# Altium PCB PCB.PcbDoc (part 2 of 2)
Units mm, origin at the board's own origin, x right, y up, seen from the top; angles counter-clockwise.
Board outline 200.03 x 130.81 mm, 2 copper layers (Top Layer, Bottom Layer); 172 components, 135 nets, 513 pads, 0 vias.
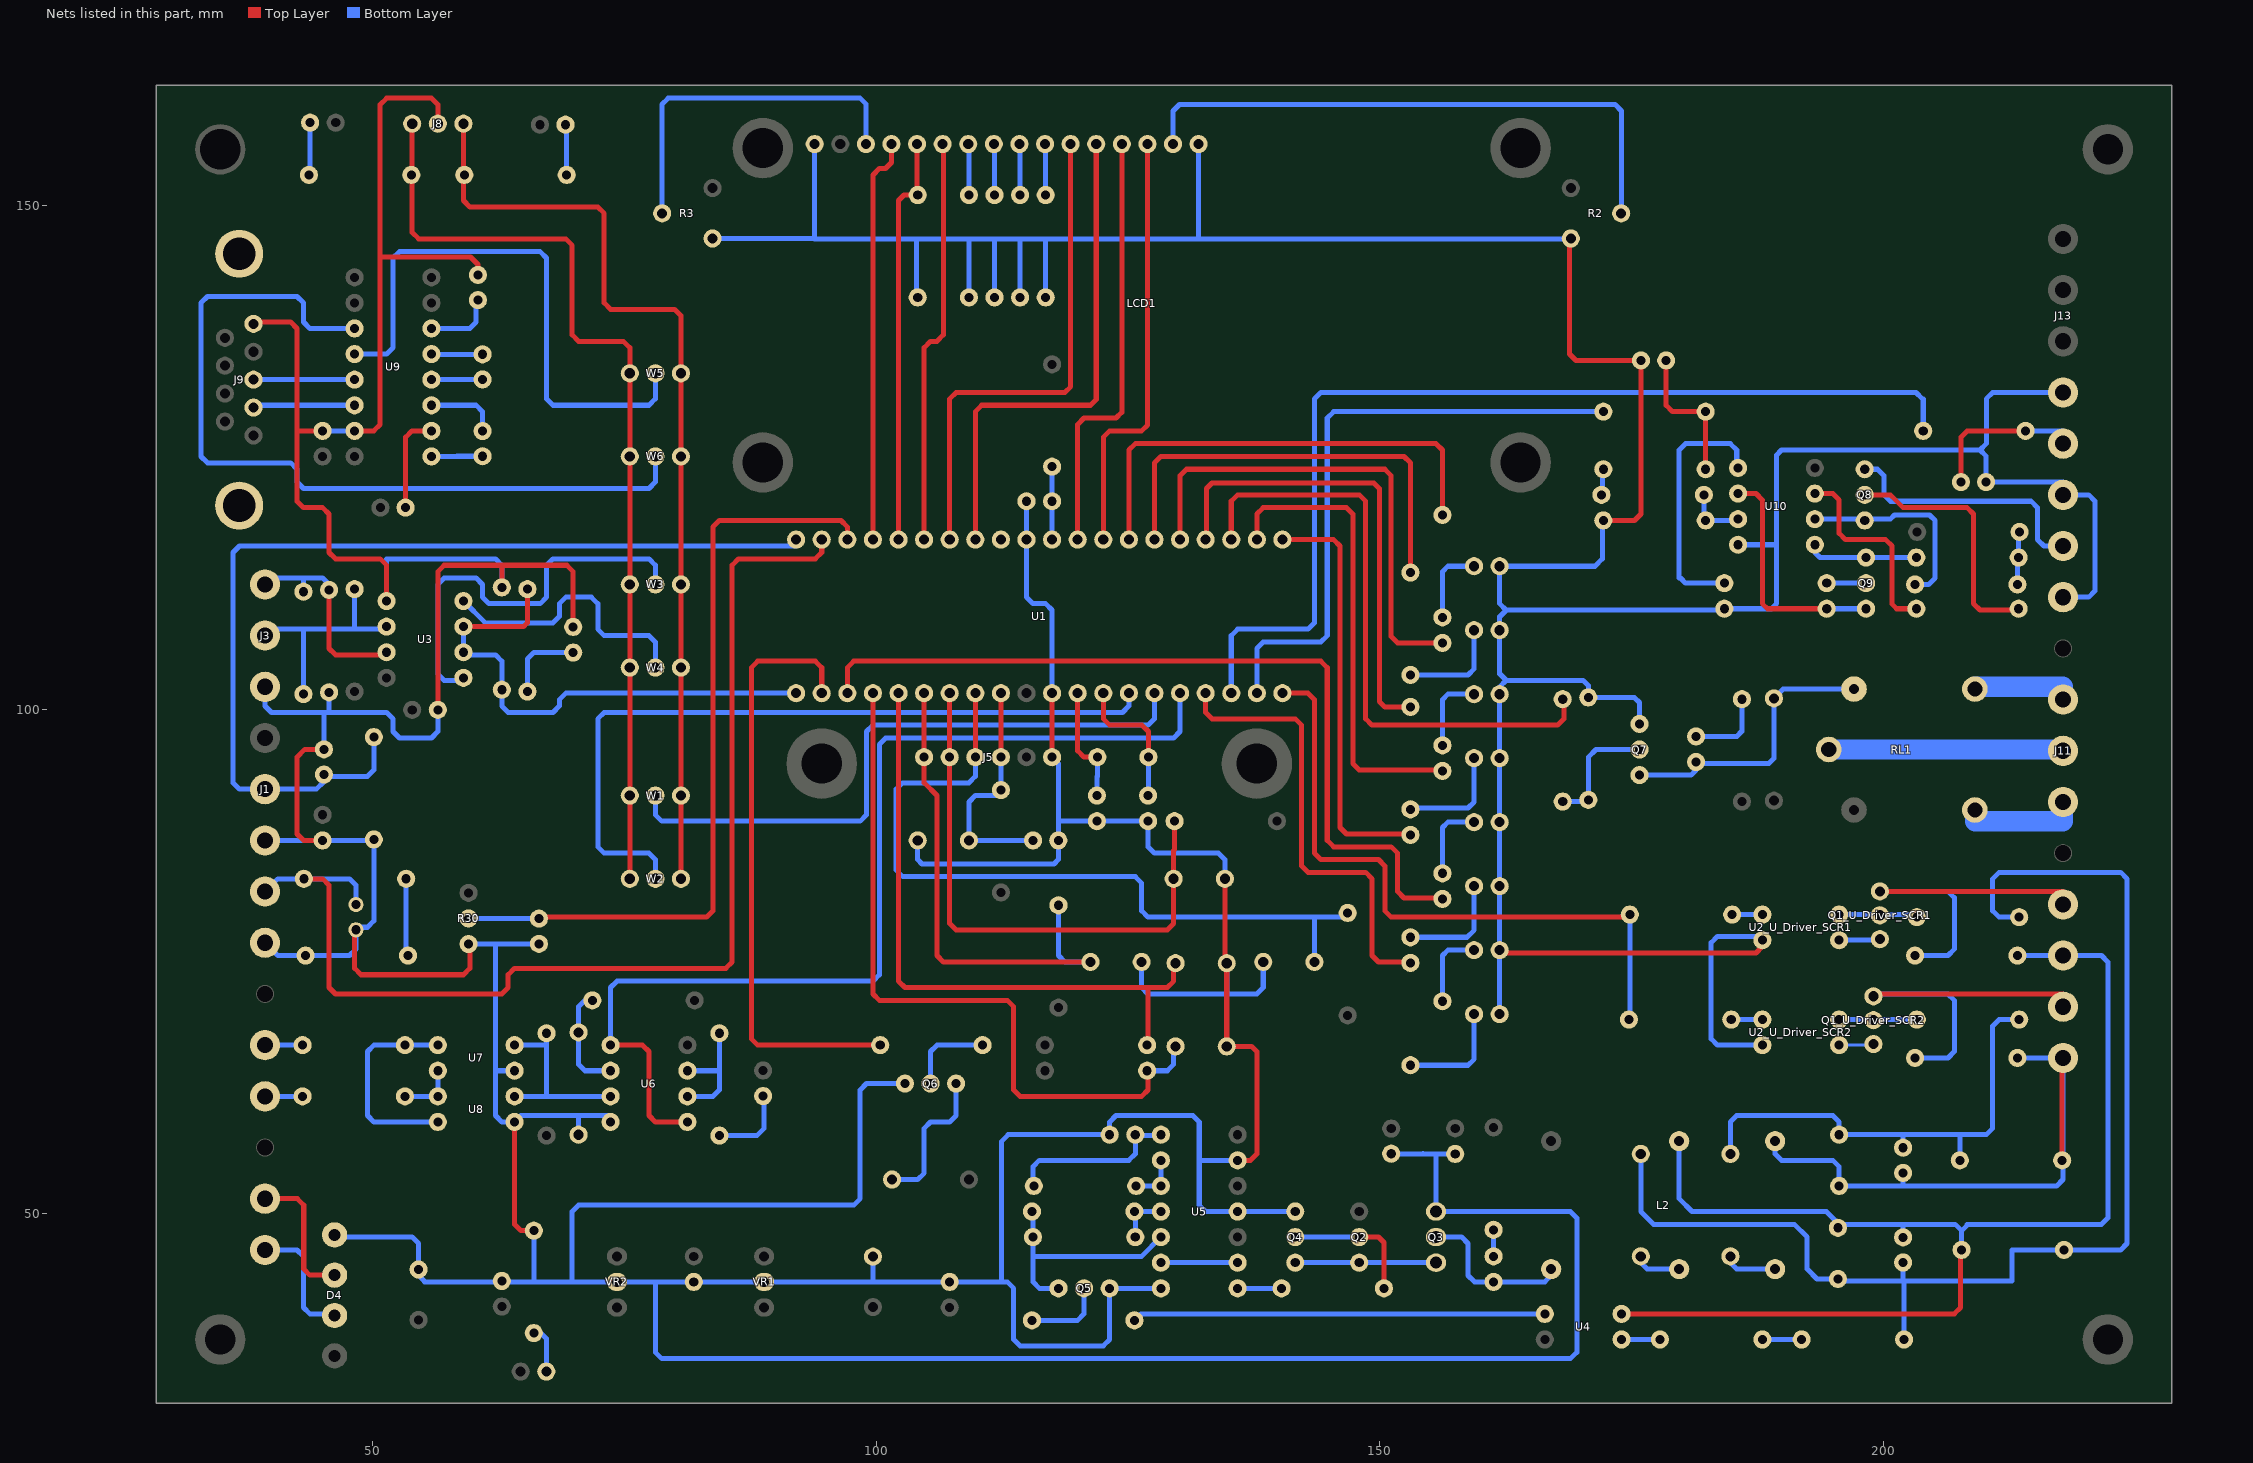
[diagram p2: the nets of this part, all layers, seen from the top]

## Nets (pads, with @x,y where several pads share a name; then routed paths per layer and width w, separated by ;. In a path a pad name is that pad's centre, name@x,y a point inside that pad or via, vN(x,y) a via of type N, cw(c..) or ccw(c..) an arc to the next point about the centre after c; other vN are vias at no path point) (continued)
GND: "C17_U_PWM to DC1.2" "C17_U_PWM to DC2.2" "J6_U_PWM to DC2.1" C1.2 C2.2 C3.2 C4.2 C5.2 C6.2 C7.1 C8.1 C9.2 C10.2 C12.1 C14.2 C18.1 C20.2 C24.1 C25.2 C26.2 C27.2 C28.1 D1_U_Display_LED1.2 D1_U_Display_LED2.2 D1_U_Display_LED3.2 D1_U_Display_LED4.2 D1_U_Display_LED5.2 D1_U_Display_LED6.2 D1_U_Display_LED7.2 D1_U_Display_LED8.2 D3.2 D4.1 D10.2 J1.3 J3.3 J5.6 J8.2 J9.5 J9.10 J9.11 J10.2 J12.1 J13.1 K1.1 K2_U_Key_Pull-up1.1 K2_U_Key_Pull-up2.1 K2_U_Key_Pull-up3.1 K2_U_Key_Pull-up4.1 K2_U_Key_Pull-up5.1 LCD1.1 LCD1.16 Q3.3 Q4.1 Q5.3 Q6.3 Q7.3 R1.2 R2.2 R3.1 R4.1 R9.1 R13.2 R14.1 R15.2 R30.1 R35.2 R38.1 R48.2 R49.1 R50.1 R51.1 R52.1 U1.11 U1.31 U2_U_Driver_SCR1.2 U2_U_Driver_SCR2.2 U3.5 U5.7 U5.11 U5.13 U6.4 U7.3 U8.3 U9.15 U10.4 VR1.2 VR2.2 | length 1187.1
  Top Layer w0.5: J9.5@38.225,138.255 38.4,138.43 41.91,138.43 42.545,137.795 42.545,127.635 ; C2.2@45.085,86.995 43.18,86.995 42.545,87.63 42.545,95.25 43.324,96.029 C1.2@45.212,96.029 ; C25.2@45.085,127.635 42.545,127.635 ; C27.2@48.26,78.248 48.26,74.295 48.895,73.66 59.055,73.66 59.69,74.295 59.69,76.2 59.563,76.327 R30.1@59.563,76.708 ; U9.15@48.26,127.635 50.165,127.635 50.8,128.27 50.8,144.882 ; U3.5@51.435,110.744 51.435,114.3 50.8,114.935 46.355,114.935 45.72,115.57 45.72,119.38 45.085,120.015 43.18,120.015 42.545,120.65 42.545,127.635 ; C6.2@56.515,99.949 56.515,113.665 57.15,114.3 62.865,114.3 ; J8.2@56.515,158.115 56.515,160.02 55.88,160.655 51.435,160.655 50.8,160.02 50.8,144.882 ; C24.1@60.5,143.109 60.5,144.145 59.763,144.882 50.8,144.882 ; R14.1@62.865,112.104 62.865,114.3 ; U8.3@64.135,59.055 64.135,48.895 64.77,48.26 R15.2@66.04,48.26 ; D3.2@69.95,108.174 69.95,113.665 69.315,114.3 62.865,114.3 ; J5.6@117.475,95.25 U1.11@117.475,101.6 ; K2_U_Key_Pull-up2.1@134.62,74.93 K2_U_Key_Pull-up1.1@134.62,83.185 ; K2_U_Key_Pull-up2.1@134.808,74.805 K2_U_Key_Pull-up3.1@134.808,66.55 137.285,66.55 137.795,66.04 137.795,55.88 137.16,55.245 U5.13@135.89,55.245 ; D1_U_Display_LED7.2@161.925,75.819 187.325,75.819 187.96,76.454 U2_U_Driver_SCR1.2@187.96,77.089 ; R2.2@168.823,147.196 168.823,135.255 169.458,134.62 175.915,134.62 175.915,119.38 175.28,118.745 172.81,118.745 R48.2@172.302,118.237
  Bottom Layer w0.5: J10.2@39.37,76.835 40.64,75.565 R35.2@43.397,75.565 47.752,75.565 48.387,76.2 48.387,78.375 49.53,78.375 50.165,79.01 R1.2@50.165,86.995 ; J1.3@39.37,86.995 C2.2@45.085,86.995 R1.2@50.165,86.995 ; J3.3@39.37,102.235 39.37,100.33 40.005,99.695 45.72,99.695 ; C25.2@45.085,127.635 U9.15@48.26,127.635 ; C1.2@45.212,96.029 45.212,99.568 ; R13.2@45.72,101.69 45.72,99.695 ; D4.1@46.275,47.846 46.496,47.625 53.975,47.625 54.61,46.99 C9.2@54.61,44.41 54.61,43.815 55.205,43.22 ; R1.2@50.165,87.085 R1.2@50.165,86.995 ; U3.5@51.435,110.744 51.435,114.935 62.23,114.935 62.865,114.3 R14.1@62.865,112.104 ; 55.205,43.18 69.85,43.18 ; C6.2@56.515,99.949 56.515,97.79 55.88,97.155 52.705,97.155 52.07,97.79 52.07,99.06 51.435,99.695 45.72,99.695 ; R30.1@59.563,76.708 63.043,76.708 63.063,76.728 C20.2@66.548,76.728 62.23,76.728 62.23,64.135 ; U7.3@64.135,64.135 62.23,64.135 ; 66.04,43.27 R15.2@66.04,48.26 ; D10.2@70.485,57.785 70.485,59.69 ; U6.4@73.66,59.055 73.66,59.69 70.485,59.69 ; R3.1@83.78,146.725 93.825,146.725 ; 93.915,146.685 104.01,146.685 ; 93.915,146.815 LCD1.1@93.915,156.098 ; C10.2@99.695,45.68 99.695,43.18 ; Q6.3@102.87,62.865 99.06,62.865 98.425,62.23 98.425,51.435 97.79,50.8 70.485,50.8 69.85,50.165 69.85,43.18 ; R4.1@104.01,141.01 104.01,146.685 ; K1.1@104.14,86.995 104.14,85.09 104.572,84.658 117.658,84.658 118.09,85.09 C26.2@118.09,86.995 ; R52.1@109.22,140.88 109.22,146.685 ; R51.1@111.76,140.88 111.76,146.685 ; R50.1@114.3,140.88 114.3,146.685 ; C3.2@114.935,120.65 U1.31@114.935,116.84 114.935,111.125 115.57,110.49 116.84,110.49 117.475,109.855 U1.11@117.475,101.6 ; R9.1@116.84,140.88 116.84,146.685 ; J5.6@117.475,95.25 118.09,94.635 C26.2@118.09,86.995 ; K2_U_Key_Pull-up4.1@126.365,74.93 126.365,72.39 127,71.755 134.62,71.755 ; U5.7@128.27,42.545 Q5.3@123.19,42.545 123.19,37.465 122.555,36.83 114.3,36.83 113.665,37.465 113.665,42.545 113.03,43.18 112.395,43.18 ; 132.015,146.75 LCD1.16@132.015,156.098 ; K2_U_Key_Pull-up1.1@134.62,83.185 134.62,85.09 133.985,85.725 127.635,85.725 127,86.36 C4.2@127,88.9 C5.2@121.92,88.9 118.09,88.9 C26.2@118.09,86.995 ; K2_U_Key_Pull-up2.1@134.808,74.805 134.808,71.943 134.62,71.755 ; U5.13@135.89,55.245 132.08,55.245 ; K2_U_Key_Pull-up5.1@138.43,74.93 138.43,72.39 137.795,71.755 134.62,71.755 ; Q4.1@141.605,50.165 U5.11@135.89,50.165 132.715,50.165 132.08,50.8 132.08,55.245 ; C14.2@151.13,55.88 154.3,55.88 ; 154.28,55.9 154.3,55.88 ; C12.1@157.48,55.88 155.575,55.88 ; D1_U_Display_LED8.2@161.895,69.75 D1_U_Display_LED7.2@161.895,76.1 D1_U_Display_LED6.2@161.895,82.45 D1_U_Display_LED5.2@161.895,88.8 D1_U_Display_LED4.2@161.895,95.15 D1_U_Display_LED3.2@161.895,101.5 161.895,102.235 162.53,102.87 162.56,102.87 ; R2.2@168.95,146.685 116.84,146.685 ; R48.2@172.302,118.237 172.085,118.02 172.085,114.935 171.35,114.2 D1_U_Display_LED1.2@161.895,114.2 161.895,110.49 162.53,109.855 162.56,109.855 ; Q7.3@175.768,98.552 175.768,100.674 175.26,101.182 R38.1@170.688,101.182 170.688,102.362 170.18,102.87 162.56,102.87 ; U10.4@185.547,116.332 189.357,116.332 ; U2_U_Driver_SCR2.2@187.96,66.675 183.515,66.675 182.88,67.31 182.88,76.835 183.515,77.47 187.579,77.47 U2_U_Driver_SCR1.2@187.96,77.089 ; J12.1@217.805,111.125 220.345,111.125 220.98,111.76 220.98,120.65 220.345,121.285 217.805,121.285 217.805,122.555 210.165,122.555 210.165,125.115 209.55,125.73 ; J13.1@217.805,131.445 210.82,131.445 210.185,130.81 210.185,126.365 209.55,125.73 ; 62.23,64.135 62.23,59.69 62.865,59.055 U8.3@64.135,59.055 64.77,59.69 70.485,59.69 ; 69.85,43.18 VR2.2@74.295,43.18 78.105,43.18 ; 78.105,43.18 78.105,36.195 78.74,35.56 168.91,35.56 169.545,36.195 169.545,49.53 168.91,50.165 Q3.3@155.575,50.165 155.575,55.88 ; 78.105,43.18 C28.1@81.915,43.18 VR1.2@88.9,43.18 99.695,43.18 ; 99.695,43.18 C8.1@107.315,43.18 112.395,43.18 ; 104.01,146.685 109.22,146.685 ; 109.22,146.685 111.76,146.685 ; 111.76,146.685 114.3,146.685 ; 112.395,43.18 112.47,43.255 112.47,57.135 113.12,57.785 C18.1@123.19,57.785 123.19,59.055 123.825,59.69 131.445,59.69 132.08,59.055 132.08,55.245 ; 114.3,146.685 116.84,146.685 ; 154.3,55.88 155.575,55.88 ; 162.56,102.87 161.925,103.505 161.895,103.505 D1_U_Display_LED2.2@161.895,107.85 161.895,109.22 161.925,109.22 162.56,109.855 ; 162.56,109.855 184.06,109.855 R49.1@184.187,109.982 188.849,109.982 189.357,110.49 189.357,116.332 ; 189.357,116.332 189.357,125.222 189.865,125.73 209.55,125.73
GND2_U_Driver_SCR1: C11.2 C13.1 J2_U_Driver_SCR1.1 L2.3 R8_U_Driver_SCR1.2 R17.2 U4.2 | length 128.6
  Top Layer w0.5: U4.2@173.99,40.005 207.01,40.005 207.645,40.64 R17.2@207.645,46.265 ; C13.1@195.11,48.895 C13.1@195.455,48.55
  Bottom Layer w0.5: L2.3@179.705,57.15 179.705,51.435 180.975,50.165 194.31,50.165 195.455,49.02 C13.1@195.455,48.55 195.8,48.895 201.93,48.895 ; C11.2@201.93,47.605 201.93,48.895 ; R17.2@207.735,46.355 207.735,48.26 ; R8_U_Driver_SCR1.2@213.27,75.565 J2_U_Driver_SCR1.1@217.805,75.565 221.615,75.565 222.25,74.93 222.25,49.53 221.615,48.895 208.28,48.895 208.28,48.805 207.735,48.26 ; 201.93,48.895 207.1,48.895 207.735,48.26
GND2_U_Driver_SCR2: C16.2 C17.1 J2_U_Driver_SCR2.1 L2.5 R8_U_Driver_SCR2.2 R21.2 | length 60.6
  Top Layer w0.5: R21.2@217.715,55.245 J2_U_Driver_SCR2.1@217.715,65.405
  Bottom Layer w0.5: L2.5@189.23,57.15 189.23,55.88 189.865,55.245 194.945,55.245 195.58,54.61 C17.1@195.58,52.705 201.93,52.705 ; C16.2@201.93,53.995 201.93,52.705 ; R8_U_Driver_SCR2.2@213.27,65.405 J2_U_Driver_SCR2.1@217.805,65.405 217.805,53.34 217.17,52.705 201.93,52.705
NetC1_1: C1.1 J1.2 R1.1 U1.40 | length 98.5
  Bottom Layer w0.5: R1.1@50.165,97.245 50.165,93.98 49.53,93.345 45.396,93.345 C1.1@45.212,93.529 45.212,92.837 44.45,92.075 J1.2@39.37,92.075 36.83,92.075 36.195,92.71 36.195,115.57 36.83,116.205 92.075,116.205 U1.40@92.075,116.84
NetC3_1: C3.1 L1.2 U1.30 | length 7.2
  Bottom Layer w0.5: U1.30@117.475,116.84 C3.1@117.475,120.65 L1.2@117.475,124.08
NetC4_1: C4.1 U1.13 X1.2 | length 13.9
  Top Layer w0.5: U1.13@122.555,101.6 122.555,99.06 123.19,98.425 126.405,98.425 127.04,97.79 X1.2@127.04,95.25
  Bottom Layer w0.5: C4.1@127.04,91.44 X1.2@127.04,95.25
NetC5_1: C5.1 U1.12 X1.1 | length 11.7
  Top Layer w0.5: U1.12@120.015,101.6 120.015,95.885 120.65,95.25 X1.1@121.96,95.25
  Bottom Layer w0.5: C5.1@121.92,91.44 121.92,93.32 121.96,93.36 X1.1@121.96,95.25
NetC15_1: C15.1 L2.2 Q3.2 | length 16
  Bottom Layer w0.5: Q3.2@155.575,47.625 158.115,47.625 158.75,46.99 158.75,43.815 159.385,43.18 C15.1@161.29,43.18 166.37,43.18 167.005,43.815 L2.2@167.005,44.45
NetC15_2: C15.2 R16.2 | length 2.6
  Bottom Layer w0.5: C15.2@161.29,45.72 R16.2@161.29,48.35
"NetC17_U_PWM to DC1_1": "C17_U_PWM to DC1.1" "R23_U_PWM to DC1.1" R45.1 | length 14.3
  Top Layer w0.5: 178.415,134.62 178.415,130.175 179.05,129.54 182.335,129.54 R45.1@182.335,123.825
"NetC17_U_PWM to DC2_1": "C17_U_PWM to DC2.1" "J6_U_PWM to DC2.2" "R23_U_PWM to DC2.1" | length 16.1
  Top Layer w0.5: 207.665,122.555 207.665,127 208.28,127.615 208.28,127.635 214.085,127.635
  Bottom Layer w0.5: 214.085,127.635 217.805,127.635 217.805,126.365
NetC18_2: C18.2 R18.2 U5.1 | length 17
  Bottom Layer w0.5: R18.2@115.57,52.795 115.57,54.61 116.205,55.245 125.095,55.245 125.73,55.88 C18.2@125.73,57.785 125.805,57.71 128.195,57.71 U5.1@128.27,57.785
NetC20_1: C20.1 R30.3 U1.38 | length 77.8
  Top Layer w0.5: C20.1@66.548,79.228 66.695,79.375 83.185,79.375 83.82,80.01 83.82,118.11 84.455,118.745 96.52,118.745 97.155,118.11 U1.38@97.155,116.84
  Bottom Layer w0.5: R30.3@59.563,79.248 63.043,79.248 63.063,79.228 C20.1@66.548,79.228
NetC21_1: C21.1 U9.2 | length 9.8
  Top Layer w0.5: C21.1@53.32,120.015 53.32,127 53.955,127.635 U9.2@55.88,127.635
NetC22_1: C22.1 U9.1 | length 5.1
  Bottom Layer w0.5: U9.1@55.88,125.095 58.395,125.095 58.415,125.115 C22.1@60.96,125.115
NetC22_2: C22.2 U9.3 | length 7.3
  Bottom Layer w0.5: U9.3@55.88,130.175 60.325,130.175 60.96,129.54 C22.2@60.96,127.615
NetC23_1: C23.1 U9.4 | length 5.1
  Bottom Layer w0.5: U9.4@55.88,132.715 58.395,132.715 58.415,132.735 C23.1@60.96,132.735
NetC23_2: C23.2 U9.5 | length 5.5
  Bottom Layer w0.5: U9.5@55.562,135.572 U9.5@55.88,135.255 ; U9.5@55.88,135.235 C23.2@60.96,135.235
NetC24_2: C24.2 U9.6 | length 7
  Bottom Layer w0.5: U9.6@55.88,137.795 59.69,137.795 60.325,138.43 60.325,140.434 C24.2@60.5,140.609
NetC26_1: C26.1 J5.4 K1.2 R33.2 U1.9 | length 23.8
  Top Layer w0.5: J5.4@112.395,95.25 U1.9@112.395,101.6
  Bottom Layer w0.5: J5.4@112.395,95.25 R33.2@112.395,91.985 112.395,91.44 109.855,91.44 109.22,90.805 K1.2@109.22,86.995 C26.1@115.59,86.995
NetC27_1: C27.1 J10.1 R34.1 U1.39 | length 117.3
  Top Layer w0.5: R34.1@43.217,83.185 45.085,83.185 45.72,82.55 45.72,72.39 46.355,71.755 62.865,71.755 63.5,72.39 63.5,73.66 64.135,74.295 85.09,74.295 85.725,74.93 85.725,114.3 86.36,114.935 93.98,114.935 94.615,115.57 U1.39@94.615,116.84
  Bottom Layer w0.5: J10.1@39.37,81.915 40.64,83.185 R34.1@43.217,83.185 47.752,83.185 48.387,82.55 C27.1@48.387,80.375
NetD1_U_Display_LED1_1: D1_U_Display_LED1.1 R5_U_Display_LED1.1 | length 7.9
  Bottom Layer w0.5: R5_U_Display_LED1.1@156.21,109.13 156.21,113.665 156.745,114.2 D1_U_Display_LED1.1@159.355,114.2
NetD1_U_Display_LED2_1: D1_U_Display_LED2.1 R5_U_Display_LED2.1 | length 10.4
  Bottom Layer w0.5: R5_U_Display_LED2.1@153.035,103.415 158.75,103.415 159.355,104.02 D1_U_Display_LED2.1@159.355,107.85
NetD1_U_Display_LED3_1: D1_U_Display_LED3.1 R5_U_Display_LED3.1 | length 7.9
  Bottom Layer w0.5: R5_U_Display_LED3.1@156.21,96.43 156.21,100.965 156.745,101.5 D1_U_Display_LED3.1@159.355,101.5
NetD1_U_Display_LED4_1: D1_U_Display_LED4.1 R5_U_Display_LED4.1 | length 11
  Bottom Layer w0.5: R5_U_Display_LED4.1@153.035,90.08 153.155,90.2 158.75,90.2 159.355,90.805 D1_U_Display_LED4.1@159.355,95.15
NetD1_U_Display_LED5_1: D1_U_Display_LED5.1 R5_U_Display_LED5.1 | length 7.9
  Bottom Layer w0.5: R5_U_Display_LED5.1@156.21,83.73 156.21,88.265 156.745,88.8 D1_U_Display_LED5.1@159.355,88.8
NetD1_U_Display_LED6_1: D1_U_Display_LED6.1 R5_U_Display_LED6.1 | length 11
  Bottom Layer w0.5: R5_U_Display_LED6.1@153.035,77.38 158.655,77.38 159.355,78.08 D1_U_Display_LED6.1@159.355,82.45
NetD1_U_Display_LED7_1: D1_U_Display_LED7.1 R5_U_Display_LED7.1 | length 7.9
  Bottom Layer w0.5: R5_U_Display_LED7.1@156.21,71.03 156.21,75.565 156.745,76.1 D1_U_Display_LED7.1@159.355,76.1
NetD1_U_Display_LED8_1: D1_U_Display_LED8.1 R5_U_Display_LED8.1 | length 11
  Bottom Layer w0.5: R5_U_Display_LED8.1@153.035,64.68 158.75,64.68 159.355,65.285 D1_U_Display_LED8.1@159.355,69.75
NetD3_1: D3.1 R10.1 | length 8
  Bottom Layer w0.5: R10.1@65.405,101.764 65.405,104.999 66.04,105.634 D3.1@69.95,105.634
NetD4_2: D4.2 J4.2 | length 12.6
  Bottom Layer w0.5: J4.2@39.37,46.355 42.545,46.355 43.18,45.72 43.18,40.64 43.815,40.005 46.195,40.005 46.275,39.925 D4.2@46.275,39.846
NetD4_4: D4.4 J4.1 | length 13.8
  Top Layer w0.5: J4.1@39.37,51.435 42.576,51.435 43.211,50.8 43.211,44.45 43.815,43.846 D4.4@46.275,43.846
NetD5_2: D5.2 R15.1 | length 4.7
  Bottom Layer w0.5: R15.1@66.04,38.1 66.735,38.1 67.28,37.555 D5.2@67.28,34.28
NetD6_1: D6.1 L2.4 | length 4.7
  Bottom Layer w0.5: D6.1@175.895,45.72 175.895,45.085 176.53,44.45 L2.4@179.705,44.45
NetD7_1: D7.1 U4.1 | length 3.8
  Bottom Layer w0.5: U4.1@173.99,37.465 D7.1@177.8,37.465
NetD7_2: D7.2 R53.2 | length 3.9
  Bottom Layer w0.5: D7.2@187.96,37.465 R53.2@191.86,37.465
NetD8_1: D8.1 L2.6 | length 5.3
  Bottom Layer w0.5: D8.1@184.785,45.72 184.785,45.085 185.42,44.45 L2.6@189.23,44.45
NetD9_1: D9.1 Q5.1 R19.1 U5.5 | length 23.2
  Bottom Layer w0.5: R19.1@115.57,50.075 D9.1@115.57,47.625 115.57,45.72 ; Q5.1@118.11,42.545 116.205,42.545 115.57,43.18 115.57,45.72 ; U5.5@128.27,47.625 126.365,45.72 115.57,45.72
NetD9_2: D9.2 R19.2 U5.4 | length 5.1
  Bottom Layer w0.5: R19.2@125.64,50.165 U5.4@128.27,50.165 ; D9.2@125.73,47.625 R19.2@125.73,50.075
NetD10_1: D10.1 R25.2 U6.2 | length 10.8
  Bottom Layer w0.5: R25.2@71.845,71.12 71.12,71.12 70.485,70.485 D10.1@70.485,67.945 70.485,64.77 71.12,64.135 U6.2@73.66,64.135
NetD11_2: D11.2 R29.1 | length 7.9
  Bottom Layer w0.5: R29.1@84.455,57.695 88.175,57.695 88.9,58.42 D11.2@88.9,61.525
NetD12_2: D12.2 R31.1 | length 5.2
  Bottom Layer w0.5: R31.1@43.725,153.035 43.845,153.155 D12.2@43.845,158.215
NetD13_2: D13.2 R32.1 | length 4.9
  Bottom Layer w0.5: R32.1@69.305,153.035 D13.2@69.305,157.895
NetD14_1: D14.1 R36.2 | length 8
  Bottom Layer w0.5: D14.1@181.383,97.312 185.42,97.312 185.898,97.79 185.928,97.79 R36.2@185.928,101.002
NetD14_2: D14.2 D15.1 Q7.1 RL1.5 | length 28.9
  Bottom Layer w0.5: Q7.1@175.768,93.472 180.875,93.472 181.383,93.98 D14.2@181.383,94.772 181.54,94.615 188.595,94.615 189.103,95.123 D15.1@189.103,101.092 190.023,102.012 RL1.5@197.053,102.012
NetD16_1: D16.1 R40.2 R42.2 | length 5.1
  Bottom Layer w0.5: R40.2@213.27,112.395 R42.2@213.27,114.935 ; R42.2@213.36,115.099 213.36,117.475 D16.1@213.487,117.602
NetJ2_U_Driver_SCR1_2: J2_U_Driver_SCR1.2 Q1_U_Driver_SCR1.E R8_U_Driver_SCR1.1 | length 36.4
  Top Layer w0.5: Q1_U_Driver_SCR1.E@199.62,81.939 199.644,81.915 217.805,81.915 J2_U_Driver_SCR1.2@217.805,80.645
  Bottom Layer w0.5: Q1_U_Driver_SCR1.E@199.62,81.939 206.375,81.939 207.01,81.304 207.01,76.2 206.375,75.565 R8_U_Driver_SCR1.1@203.11,75.565
NetJ2_U_Driver_SCR2_2: J2_U_Driver_SCR2.2 Q1_U_Driver_SCR2.E R8_U_Driver_SCR2.1 | length 37.2
  Top Layer w0.5: Q1_U_Driver_SCR2.E@199.215,71.755 217.805,71.755 J2_U_Driver_SCR2.2@217.805,70.485
  Bottom Layer w0.5: Q1_U_Driver_SCR2.E@199.215,71.755 206.375,71.755 207.01,71.12 207.01,66.04 206.375,65.405 R8_U_Driver_SCR2.1@203.11,65.405
NetJ3_1: J3.1 R11.2 R13.1 U3.7 | length 21.4
  Top Layer w0.5: R13.1@45.72,111.85 45.72,106.045 46.355,105.41 51.435,105.41 U3.7@51.435,105.664
  Bottom Layer w0.5: J3.1@39.37,112.395 40.005,113.03 43.18,113.03 ; R11.2@43.18,111.67 43.18,113.03 ; R13.1@45.72,111.85 45.72,112.395 45.085,113.03 43.18,113.03 ; U3.7@51.054,106.045 U3.7@51.435,105.664
NetJ3_2: J3.2 R11.1 R12.2 U3.6 | length 23.6
  Bottom Layer w0.5: J3.2@39.37,107.315 J3.2@40.005,107.95 ; J3.2@39.37,107.95 J3.2@40.005,107.95 ; R11.1@43.18,101.51 43.18,107.95 ; R12.2@48.26,111.924 48.26,107.95 ; U3.6@51.435,108.204 51.435,107.95 48.26,107.95 ; J3.2@40.005,107.95 43.18,107.95 ; 43.18,107.95 48.26,107.95
NetJ5_1: J5.1 K2_U_Key_Pull-up4.2 R39_U_Key_Pull-up4.2 U1.6 | length 50.5
  Top Layer w0.5: U1.6@104.775,101.6 J5.1@104.775,95.25 104.775,92.71 106.045,91.44 106.045,75.565 106.68,74.93 K2_U_Key_Pull-up4.2@121.285,74.93
  Bottom Layer w0.5: R39_U_Key_Pull-up4.2@118.11,80.555 118.11,75.565 118.745,74.93 K2_U_Key_Pull-up4.2@121.285,74.93
NetJ5_2: J5.2 K2_U_Key_Pull-up1.2 R39_U_Key_Pull-up1.2 U1.7 | length 55.8
  Top Layer w0.5: U1.7@107.315,101.6 J5.2@107.315,95.25 107.315,78.74 107.95,78.105 128.905,78.105 129.54,78.74 K2_U_Key_Pull-up1.2@129.54,83.185 129.54,85.979 129.63,86.069 R39_U_Key_Pull-up1.2@129.63,88.9
NetJ5_3: J5.3 K2_U_Key_Pull-up5.2 R39_U_Key_Pull-up5.2 U1.8 | length 77.6
  Top Layer w0.5: J5.3@109.855,95.25 U1.8@109.855,101.6
  Bottom Layer w0.5: J5.3@109.855,95.25 109.855,93.345 109.22,92.71 102.641,92.71 102.006,92.075 102.006,84.049 102.667,83.388 125.73,83.388 126.365,82.753 126.365,80.01 127,79.375 143.51,79.375 ; K2_U_Key_Pull-up5.2@143.51,74.93 143.51,79.375 ; R39_U_Key_Pull-up5.2@146.81,79.795 146.39,79.375 143.51,79.375
NetJ7_1: J7.1 R28.1 | length 3.7
  Bottom Layer w0.5: J7.1@39.37,66.675 R28.1@43.09,66.675
NetJ7_2: J7.2 R27.1 | length 3.7
  Bottom Layer w0.5: J7.2@39.37,61.595 R27.1@43.09,61.595
NetJ8_1: J8.1 R31.2 W1.1 W2.1 W3.1 W4.1 W5.1 W6.1 | length 95
  Top Layer w0.5: J8.1@53.975,158.115 53.975,147.32 54.61,146.685 69.215,146.685 69.85,146.05 69.85,137.16 70.485,136.525 74.93,136.525 75.565,135.89 W5.1@75.565,133.35 W6.1@75.565,125.095 W3.1@75.565,112.395 W4.1@75.565,104.14 W1.1@75.565,91.44 W2.1@75.565,83.185
NetJ8_3: J8.3 R32.2 W1.3 W2.3 W3.3 W4.3 W5.3 W6.3 | length 95
  Top Layer w0.5: J8.3@59.055,158.115 59.055,150.495 59.69,149.86 72.39,149.86 73.025,149.225 73.025,140.335 73.66,139.7 80.01,139.7 80.645,139.065 W5.3@80.645,133.35 W6.3@80.645,125.095 W3.3@80.645,112.395 W4.3@80.645,104.14 W1.3@80.645,91.44 W2.3@80.645,83.185
NetJ9_2: J9.2 U9.14 | length 10.2
  Bottom Layer w0.5: J9.2@38.1,130.175 U9.14@48.26,130.175
NetJ9_3: J9.3 U9.13 | length 10
  Bottom Layer w0.5: J9.3@38.225,132.715 U9.13@48.26,132.715
NetJ11_1: J11.1 RL1.2 | length 11.8
  Bottom Layer w2: RL1.2@209.053,90.012 209.053,88.9 210.165,88.9 217.805,88.9 J11.1@217.805,90.805
NetJ11_2: J11.2 RL1.1 | length 23.3
  Bottom Layer w2: RL1.1@194.553,96.012 217.678,96.012 J11.2@217.805,95.885
NetJ11_3: J11.3 RL1.3 | length 10.2
  Bottom Layer w2: RL1.3@209.053,102.012 209.053,102.235 209.276,102.235 217.805,102.235 J11.3@217.805,100.965
NetJ12_2: J12.2 Q8.1 | length 25.8
  Bottom Layer w0.5: Q8.1@198.12,123.825 199.39,123.825 200.025,123.19 200.025,121.285 200.66,120.65 214.63,120.65 215.265,120.015 215.265,116.84 215.9,116.205 J12.2@217.805,116.205
NetK2_U_Key_Pull-up2_2: K2_U_Key_Pull-up2.2 R39_U_Key_Pull-up2.2 U1.5 | length 63.9
  Top Layer w0.5: U1.5@102.235,101.6 102.235,73.025 102.87,72.39 127,72.39 ; R39_U_Key_Pull-up2.2@127,66.765 127,72.39 ; K2_U_Key_Pull-up2.2@129.728,74.805 129.665,74.805 129.54,74.68 129.54,73.025 128.905,72.39 127,72.39
NetK2_U_Key_Pull-up3_2: K2_U_Key_Pull-up3.2 R39_U_Key_Pull-up3.2 U1.4 | length 73.5
  Top Layer w0.5: U1.4@99.695,101.6 99.695,71.755 100.33,71.12 113.03,71.12 113.665,70.485 113.665,62.23 114.3,61.595 126.365,61.595 127,62.23 127,64.135 R39_U_Key_Pull-up3.2@126.91,64.135
  Bottom Layer w0.5: R39_U_Key_Pull-up3.2@126.91,64.135 128.905,64.135 129.54,64.77 129.54,66.612 129.603,66.675 K2_U_Key_Pull-up3.2@129.728,66.55
NetLCD1_3: LCD1.3 R3.3 | length 35.5
  Bottom Layer w0.5: R3.3@78.526,149.315 78.74,149.529 78.74,160.02 79.375,160.655 98.425,160.655 98.995,160.085 LCD1.3@98.995,156.098
NetLCD1_4: LCD1.4 U1.37 | length 40.4
  Top Layer w0.5: U1.37@99.695,116.84 99.695,153.035 100.33,153.67 100.933,153.67 101.535,154.273 LCD1.4@101.535,156.098
NetLCD1_5: LCD1.5 R4.2 U1.36 | length 40.8
  Top Layer w0.5: U1.36@102.235,116.84 102.235,150.495 102.78,151.04 R4.2@104.14,151.04 ; R4.2@104.075,151.13 LCD1.5@104.075,156.098
NetLCD1_6: LCD1.6 U1.35 | length 40.4
  Top Layer w0.5: U1.35@104.775,116.84 104.775,135.89 105.41,136.525 106.045,136.525 106.68,137.16 106.68,156.033 LCD1.6@106.615,156.098
NetLCD1_7: LCD1.7 R52.2 | length 5
  Bottom Layer w0.5: R52.2@109.22,151.04 LCD1.7@109.22,156.033
NetLCD1_8: LCD1.8 R51.2 | length 5
  Bottom Layer w0.5: R51.2@111.76,151.04 LCD1.8@111.76,156.033
NetLCD1_9: LCD1.9 R50.2 | length 5
  Bottom Layer w0.5: R50.2@114.3,151.04 LCD1.9@114.3,156.033
NetLCD1_10: LCD1.10 R9.2 | length 5.2
  Bottom Layer w0.5: LCD1.10@116.775,156.098 116.842,156.035 LCD1.10@116.908,155.971 ; R9.2@116.84,151.04 LCD1.10@116.84,156.033
NetLCD1_11: LCD1.11 U1.34 | length 50.6
  Top Layer w0.5: U1.34@107.315,116.84 107.315,130.81 107.95,131.445 118.745,131.445 119.315,132.015 LCD1.11@119.315,156.098
NetLCD1_12: LCD1.12 U1.33 | length 50.6
  Top Layer w0.5: U1.33@109.855,116.84 109.855,129.54 110.49,130.175 121.285,130.175 121.855,130.745 LCD1.12@121.855,156.098
NetLCD1_13: LCD1.13 U1.29 | length 42.9
  Top Layer w0.5: U1.29@120.015,116.84 120.015,128.27 120.65,128.905 123.825,128.905 124.395,129.475 LCD1.13@124.395,156.098
NetLCD1_14: LCD1.14 U1.28 | length 42.9
  Top Layer w0.5: U1.28@122.555,116.84 122.555,127 123.19,127.635 126.365,127.635 126.935,128.205 LCD1.14@126.935,156.098
NetLCD1_15: LCD1.15 R2.3 | length 58.6
  Bottom Layer w0.5: LCD1.15@129.475,156.098 129.475,159.385 130.11,160.02 173.355,160.02 173.99,159.385 173.99,149.392 R2.3@173.823,149.225
NetLS1_2: LS1.2 Q6.1 | length 14.8
  Bottom Layer w0.5: LS1.2@101.6,53.34 104.14,53.34 104.775,53.975 104.775,58.42 105.41,59.055 107.315,59.055 107.95,59.69 Q6.1@107.95,62.865
NetQ1_U_Driver_SCR1_B: Q1_U_Driver_SCR1.B U2_U_Driver_SCR1.3 | length 4
  Bottom Layer w0.5: U2_U_Driver_SCR1.3@195.58,77.089 199.52,77.089 Q1_U_Driver_SCR1.B@199.568,77.089
NetQ1_U_Driver_SCR1_C: Q1_U_Driver_SCR1.C R6_U_Driver_SCR1.2 U2_U_Driver_SCR1.4 | length 8
  Bottom Layer w0.5: U2_U_Driver_SCR1.4@195.58,79.629 203.29,79.629 R6_U_Driver_SCR1.2@203.29,79.375
NetQ1_U_Driver_SCR2_B: Q1_U_Driver_SCR2.B U2_U_Driver_SCR2.3 | length 3.4
  Bottom Layer w0.3: U2_U_Driver_SCR2.3@195.58,66.675 Q1_U_Driver_SCR2.B@198.885,66.675
  Bottom Layer w0.5: Q1_U_Driver_SCR2.B@198.885,66.675 Q1_U_Driver_SCR2.B@198.985,66.775
NetQ1_U_Driver_SCR2_C: Q1_U_Driver_SCR2.C R6_U_Driver_SCR2.2 U2_U_Driver_SCR2.4 | length 8.3
  Bottom Layer w0.5: U2_U_Driver_SCR2.4@195.58,69.215 Q1_U_Driver_SCR2.C@198.92,69.215 ; Q1_U_Driver_SCR2.C@199.367,69.532 Q1_U_Driver_SCR2.C@198.985,69.15 Q1_U_Driver_SCR2.C@198.92,69.215 ; R6_U_Driver_SCR2.2@203.29,69.215 Q1_U_Driver_SCR2.C@198.92,69.215
NetQ2_2: Q2.2 Q4.2 R20.2 | length 13.6
  Top Layer w0.5: Q2.2@147.955,47.625 149.86,47.625 150.405,47.08 R20.2@150.405,42.545
  Bottom Layer w0.5: Q4.2@141.605,47.625 Q2.2@147.955,47.625
NetQ2_3: Q2.3 Q3.1 Q4.3 | length 14
  Bottom Layer w0.5: Q4.3@141.605,45.085 Q2.3@147.955,45.085 Q3.1@155.575,45.085
NetQ5_2: Q5.2 R22.1 | length 8
  Bottom Layer w0.5: R22.1@115.48,39.37 120.015,39.37 120.65,40.005 Q5.2@120.65,42.545
NetQ6_2: Q6.2 R24.1 | length 8.6
  Bottom Layer w0.5: Q6.2@105.41,62.865 105.41,66.04 106.045,66.675 R24.1@110.58,66.675
NetQ7_2: Q7.2 R37.1 R38.2 | length 12.3
  Bottom Layer w0.5: R37.1@168.148,90.842 R38.2@170.815,90.842 ; R38.2@170.688,91.022 170.688,95.25 171.45,96.012 Q7.2@175.768,96.012
NetQ8_2: Q8.2 R43.2 | length 25.3
  Top Layer w0.5: Q8.2@198.12,121.285 200.66,121.285 201.93,120.015 208.28,120.015 208.915,119.38 208.915,110.49 209.55,109.855 213.27,109.855 R43.2@213.397,109.982
NetQ8_3: Q8.3 R40.1 U10.6 | length 20.3
  Bottom Layer w0.5: U10.6@193.167,118.872 200.66,118.872 201.081,119.293 204.557,119.293 205.105,118.745 205.105,113.03 204.47,112.395 R40.1@203.11,112.395
NetQ9_1: Q9.1 R42.1 U10.5 | length 11
  Bottom Layer w0.5: U10.5@193.167,116.332 193.167,115.57 193.675,115.062 Q9.1@198.247,115.062 R42.1@203.237,115.062
NetQ9_2: Q9.2 R47.2 | length 3.9
  Bottom Layer w0.5: R47.2@194.347,112.522 Q9.2@198.247,112.522
NetQ9_3: Q9.3 R49.2 U10.2 | length 23.5
  Top Layer w0.5: U10.2@185.547,121.412 187.325,121.412 187.96,120.777 187.96,110.49 188.468,109.982 R49.2@194.347,109.982
  Bottom Layer w0.5: R49.2@194.347,109.982 Q9.3@198.247,109.982
NetR5_U_Display_LED1_2: R5_U_Display_LED1.2 U1.27 | length 47
  Top Layer w0.5: U1.27@125.095,116.84 125.095,125.73 125.73,126.365 155.575,126.365 156.21,125.73 R5_U_Display_LED1.2@156.21,119.29
NetR5_U_Display_LED2_2: R5_U_Display_LED2.2 U1.26 | length 44.4
  Top Layer w0.5: U1.26@127.635,116.84 127.635,124.46 128.27,125.095 152.4,125.095 153.035,124.46 R5_U_Display_LED2.2@153.035,113.575
NetR5_U_Display_LED3_2: R5_U_Display_LED3.2 U1.25 | length 49.1
  Top Layer w0.5: U1.25@130.175,116.84 130.175,123.19 130.81,123.825 150.495,123.825 151.13,123.19 151.13,107.225 151.765,106.59 R5_U_Display_LED3.2@156.21,106.59
NetR5_U_Display_LED4_2: R5_U_Display_LED4.2 U1.24 | length 47.1
  Top Layer w0.5: U1.24@132.805,116.93 132.805,121.92 133.35,122.465 149.405,122.465 149.95,121.92 149.95,100.785 150.495,100.24 R5_U_Display_LED4.2@153.035,100.24 R5_U_Display_LED4.2@153.035,100.33
NetR5_U_Display_LED5_2: R5_U_Display_LED5.2 U1.22 | length 46.6
  Top Layer w0.5: U1.22@137.795,116.84 137.795,119.38 138.43,120.015 146.685,120.015 147.32,119.38 147.32,94.615 147.955,93.98 156.21,93.98 R5_U_Display_LED5.2@156.21,93.89
NetR5_U_Display_LED6_2: R5_U_Display_LED6.2 U1.21 | length 41.3
  Top Layer w0.5: U1.21@140.335,116.84 145.415,116.84 146.05,116.205 146.05,88.265 146.685,87.63 153.035,87.63 R5_U_Display_LED6.2@153.035,87.54
NetR5_U_Display_LED7_2: R5_U_Display_LED7.2 U1.3 | length 84
  Top Layer w0.5: U1.3@97.155,101.6 97.155,104.14 97.79,104.775 144.145,104.775 144.78,104.14 144.78,86.995 145.415,86.36 151.13,86.36 151.765,85.725 151.765,81.915 152.4,81.28 156.21,81.28 R5_U_Display_LED7.2@156.21,81.19
NetR5_U_Display_LED8_2: R5_U_Display_LED8.2 U1.17 | length 45.2
  Top Layer w0.5: U1.17@132.715,101.6 132.715,99.695 133.35,99.06 141.605,99.06 142.24,98.425 142.24,84.455 142.875,83.82 148.59,83.82 149.225,83.185 149.225,75.565 149.86,74.93 153.035,74.93 R5_U_Display_LED8.2@153.035,74.84
NetR7_U_Driver_SCR1_1: R7_U_Driver_SCR1.1 U2_U_Driver_SCR1.1 | length 3
  Bottom Layer w0.5: R7_U_Driver_SCR1.1@184.965,79.629 U2_U_Driver_SCR1.1@187.96,79.629
NetR7_U_Driver_SCR1_2: R7_U_Driver_SCR1.2 R7_U_Driver_SCR2.2 U1.20 | length 65.8
  Top Layer w0.5: U1.20@140.335,101.6 142.875,101.6 143.51,100.965 143.51,85.725 144.145,85.09 149.86,85.09 150.495,84.455 150.495,80.01 151.13,79.375 174.625,79.375 174.805,79.555 R7_U_Driver_SCR1.2@174.805,79.629 ; R7_U_Driver_SCR2.2@174.715,69.215 R7_U_Driver_SCR2.2@174.805,69.305
  Bottom Layer w0.5: R7_U_Driver_SCR2.2@174.805,69.305 R7_U_Driver_SCR1.2@174.805,79.629
NetR7_U_Driver_SCR2_1: R7_U_Driver_SCR2.1 U2_U_Driver_SCR2.1 | length 3.1
  Bottom Layer w0.5: R7_U_Driver_SCR2.1@184.875,69.215 U2_U_Driver_SCR2.1@187.96,69.215
NetR10_2: R10.2 R14.2 U1.1 U3.2 U3.3 | length 51.8
  Top Layer w0.5: U3.3@59.055,108.204 65.024,108.204 65.405,108.585 R10.2@65.405,111.924
  Bottom Layer w0.5: U3.3@59.055,108.204 U3.2@59.055,105.664 59.055,105.41 62.23,105.41 62.865,104.775 R14.2@62.865,101.944 62.865,100.33 63.5,99.695 67.945,99.695 68.58,100.33 68.58,100.965 69.215,101.6 U1.1@92.075,101.6
NetR18_1: R18.1 U5.2 U5.3 | length 5
  Bottom Layer w0.5: R18.1@125.82,52.705 U5.3@128.27,52.705 U5.2@128.27,55.245
NetR20_1: R20.1 U5.8 | length 4.4
  Bottom Layer w0.5: U5.8@135.89,42.545 R20.1@140.245,42.545
NetR22_2: R22.2 U4.3 | length 41
  Bottom Layer w0.5: R22.2@125.64,39.37 126.275,40.005 U4.3@166.37,40.005
"NetR23_U_PWM to DC1_2": "R23_U_PWM to DC1.2" U1.19 | length 61.2
  Bottom Layer w0.5: U1.19@137.795,101.6 137.795,106.045 138.43,106.68 144.145,106.68 144.78,107.315 144.78,128.905 145.415,129.54 172.175,129.54
"NetR23_U_PWM to DC2_2": "R23_U_PWM to DC2.2" U1.18 | length 100.8
  Bottom Layer w0.5: U1.18@135.255,101.6 135.255,107.315 135.89,107.95 142.875,107.95 143.51,108.585 143.51,130.81 144.145,131.445 203.2,131.445 203.835,130.81 203.925,130.81 203.925,127.635
NetR24_2: R24.2 U1.2 | length 59.9
  Top Layer w0.5: U1.2@94.615,101.6 94.615,104.14 93.98,104.775 88.265,104.775 87.63,104.14 87.63,67.31 88.265,66.675 R24.2@100.42,66.675
NetR26_2: R26.2 U6.3 U7.4 U8.4 | length 19
  Bottom Layer w0.5: U8.4@64.135,61.595 67.31,61.595 ; U7.4@64.135,66.675 67.31,66.675 ; R26.2@67.31,67.855 67.31,66.675 ; U6.3@73.66,61.595 67.31,61.595 ; 67.31,61.595 67.31,66.675
NetR27_2: R27.2 U7.2 U8.1 | length 5.8
  Bottom Layer w0.5: R27.2@53.25,61.595 U8.1@56.515,61.595 U7.2@56.515,64.135
NetR28_2: R28.2 U7.1 U8.2 | length 20.8
  Bottom Layer w0.5: U8.2@56.515,59.055 50.165,59.055 49.53,59.69 49.53,66.04 50.165,66.675 R28.2@53.25,66.675 U7.1@56.515,66.675
NetR29_2: R29.2 U6.6 U6.7 | length 12.2
  Bottom Layer w0.5: U6.6@81.28,61.595 83.82,61.595 84.455,62.23 84.455,64.135 ; U6.7@81.28,64.135 84.455,64.135 ; R29.2@84.455,67.855 84.455,64.135
NetR34_2: R34.2 R35.1 | length 7.8
  Top Layer w0.5: R35.1@53.34,75.565 R35.1@53.557,75.565
  Bottom Layer w0.5: R35.1@53.34,75.565 R34.2@53.34,83.148
NetR37_2: R37.2 U1.23 | length 61.4
  Top Layer w0.5: U1.23@135.255,116.84 135.255,120.65 135.89,121.285 147.955,121.285 148.59,120.65 148.59,99.06 149.225,98.425 167.64,98.425 168.275,99.06 R37.2@168.275,100.875 ; R37.2@168.148,101.002 168.238,101.002 R37.2@168.275,101.039
NetR43_1: R43.1 U10.7 | length 20.1
  Top Layer w0.5: U10.7@193.167,121.412 194.945,121.412 195.58,120.777 195.58,117.475 196.215,116.84 200.203,116.84 200.838,116.205 200.838,110.439 201.295,109.982 R43.1@203.237,109.982
NetR45_2: R45.2 R46.1 | length 2.7
  Bottom Layer w0.5: R46.1@171.995,121.285 172.085,121.285 172.085,123.735 R45.2@172.175,123.825
NetR46_2: R46.2 R48.1 U10.3 | length 5.9
  Bottom Layer w0.5: R46.2@182.155,121.285 182.155,118.925 R48.1@182.335,118.745 185.42,118.745 U10.3@185.547,118.872
NetR47_1: R47.1 U10.1 | length 25.7
  Bottom Layer w0.5: R47.1@184.187,112.522 180.34,112.522 179.832,113.03 179.705,113.03 179.705,125.73 180.34,126.365 184.785,126.365 185.42,125.73 U10.1@185.42,124.079 ; U10.1@185.547,123.952 U10.1@185.547,124.333
NetU1_14: U1.14 W2.2 | length 75.3
  Bottom Layer w0.5: W2.2@78.105,83.185 78.105,85.09 77.47,85.725 73.025,85.725 72.39,86.36 72.39,99.06 73.025,99.695 124.46,99.695 125.095,100.33 U1.14@125.095,101.6
NetU1_15: U1.15 W1.2 | length 63.3
  Bottom Layer w0.5: W1.2@78.105,91.44 78.105,89.535 78.74,88.9 98.425,88.9 99.06,89.535 99.06,97.79 99.695,98.425 127,98.425 127.635,99.06 U1.15@127.635,101.6
NetU1_16: U1.16 U6.1 U6.5 | length 104.4
  Top Layer w0.5: U6.1@73.66,66.675 76.835,66.675 77.47,66.04 77.47,59.69 78.105,59.055 U6.5@81.28,59.055
  Bottom Layer w0.5: U6.1@73.66,66.675 73.66,72.39 74.295,73.025 99.695,73.025 100.33,73.66 100.33,96.52 100.965,97.155 129.54,97.155 130.175,97.79 U1.16@130.175,101.6
NetU1_32: U1.32
NetU3_1: U3.1 W3.2 | length 41.3
  Bottom Layer w0.5: U3.1@59.055,103.124 58.801,102.87 57.15,102.87 56.515,103.505 56.515,112.395 57.15,113.03 60.325,113.03 60.96,112.395 60.96,111.125 61.595,110.49 66.675,110.49 67.31,111.125 67.31,114.3 67.945,114.935 77.47,114.935 78.105,114.3 W3.2@78.105,112.395
NetU3_4: U3.4 W4.2 | length 27.6
  Bottom Layer w0.5: U3.4@59.055,110.744 61.214,108.585 67.945,108.585 68.58,109.22 68.58,110.49 69.215,111.125 71.755,111.125 72.39,110.49 72.39,107.95 73.025,107.315 77.47,107.315 78.105,106.68 W4.2@78.105,104.14
NetU5_6: U5.6 U5.9 | length 7.6
  Bottom Layer w0.5: U5.6@128.27,45.085 U5.9@135.89,45.085
NetU9_11: U9.11 W6.2 | length 83.1
  Bottom Layer w0.5: U9.11@48.26,137.795 43.815,137.795 43.18,138.43 43.18,140.335 42.545,140.97 33.655,140.97 33.02,140.335 33.02,125.095 33.655,124.46 41.91,124.46 42.545,123.825 42.545,122.555 43.18,121.92 77.47,121.92 78.105,122.555 W6.2@78.105,125.095
NetU9_12: U9.12 W5.2 | length 56.6
  Bottom Layer w0.5: U9.12@48.26,135.255 51.435,135.255 52.07,135.89 52.07,144.78 52.705,145.415 66.675,145.415 67.31,144.78 67.31,130.81 67.945,130.175 77.47,130.175 78.105,130.81 W5.2@78.105,133.35
VDD2_U_Driver_SCR1: C11.1 C13.2 D6.2 R6_U_Driver_SCR1.1 R17.1 R53.1 | length 125.8
  Bottom Layer w0.5: D6.2@175.895,55.88 175.895,50.165 177.165,48.895 191.135,48.895 192.405,47.625 192.405,44.45 193.385,43.47 C13.2@195.455,43.47 195.455,43.27 201.93,43.27 ; C11.1@201.93,45.105 201.93,43.27 ; R53.1@202.02,37.465 202.02,43.18 ; R6_U_Driver_SCR1.1@213.45,79.375 211.455,79.375 210.82,80.01 210.82,83.185 211.455,83.82 223.52,83.82 224.155,83.185 224.155,46.99 223.52,46.355 R17.1@217.895,46.355 212.725,46.355 212.725,43.27 201.93,43.27
VDD2_U_Driver_SCR2: C16.1 C17.2 D8.2 R6_U_Driver_SCR2.1 R21.1 | length 48.1
  Bottom Layer w0.5: D8.2@184.785,55.88 184.785,59.055 185.42,59.69 194.945,59.69 195.58,59.055 C17.2@195.58,57.785 201.93,57.785 ; C16.1@201.93,56.495 201.93,57.785 ; R21.1@207.555,55.245 207.555,57.695 ; R6_U_Driver_SCR2.1@213.45,69.215 211.455,69.215 210.82,68.58 210.82,58.42 210.185,57.785 201.93,57.785
pads on no net: J9.1 J9.4 J9.6 J9.7 J9.8 J9.9 LCD1.0 U5.10 U5.12 U9.7 U9.8 U9.9 U9.10

## Polygon pours and split planes (outlines as drawn)
GND on Bottom Layer "Bottom Layer" (solid, remove dead copper, pour order 4): 28.575,71.755 165.1,71.755 165.1,107.95 165.1,107.315 228.6,107.315 228.6,161.925 28.575,161.925
GND on Top Layer "Top Layer" (solid, remove dead copper, pour order 3): 28.575,71.755 165.1,71.755 165.1,107.95 165.1,107.315 165.735,107.315 228.6,107.315 228.6,161.925 28.575,161.925

## Keep-outs
Keep-Out Layer:
  the board outline again, w0.254

## Other copper
Top Layer:
  pour cut-out: 28.575,149.225 41.275,149.225 41.275,161.925 28.575,161.925
  pour cut-out: 215.9,149.225 228.6,149.225 228.6,161.925 215.9,161.925
  pour cut-out: 215.9,31.115 228.6,31.115 228.6,43.815 215.9,43.815
  pour cut-out: 28.575,31.115 41.275,31.115 41.275,43.815 28.575,43.815
Bottom Layer:
  pour cut-out: 28.575,31.115 41.275,31.115 41.275,43.815 28.575,43.815
  pour cut-out: 215.9,31.115 228.6,31.115 228.6,43.815 215.9,43.815
  pour cut-out: 215.9,149.225 228.6,149.225 228.6,161.925 215.9,161.925
  pour cut-out: 28.575,149.225 41.275,149.225 41.275,161.925 28.575,161.925

## Silkscreen, mask and mechanical layers (free items; w line width, h text height)
Top Overlay:
  lines w0.254: 28.575,163.576 28.575,164.084 ; 30.099,163.322 28.575,163.83 ; 30.099,164.338 28.575,163.83 ; 73.025,116.84 78.105,116.84 78.105,114.3 ; 73.025,137.795 78.105,137.795 78.105,135.255 ; 73.66,99.06 73.025,99.695 ; 73.66,100.33 73.025,99.695 ; 73.66,120.015 73.025,120.65 ; 73.66,121.285 73.025,120.65 ; 77.343,94.107 78.105,93.345 ; 77.343,115.062 78.105,114.3 ; 77.343,136.017 78.105,135.255 ; 78.105,81.28 78.105,78.74 83.185,78.74 ; 78.105,102.235 78.105,99.695 73.025,99.695 ; 78.105,123.19 78.105,120.65 73.025,120.65 ; 78.867,94.107 78.105,93.345 ; 78.867,115.062 78.105,114.3 ; 78.867,136.017 78.105,135.255 ; 82.55,78.105 83.185,78.74 ; 82.55,79.375 83.185,78.74 ; 83.185,95.885 78.105,95.885 78.105,93.345 ; 119.802,163.83 28.575,163.83 ; 137.373,163.83 228.6,163.83 ; 170.18,31.115 170.18,62.865 191.77,62.865 191.77,85.725 227.33,85.725 228.6,85.725 ; 227.076,163.322 228.6,163.83 ; 227.076,164.338 228.6,163.83 ; 228.6,163.576 228.6,164.084 ; 231.267,32.639 231.775,31.115 ; 231.267,160.401 231.775,161.925 ; 231.521,31.115 232.029,31.115 ; 231.521,161.925 232.029,161.925 ; 231.775,88.75 231.775,31.115 ; 231.775,104.29 231.775,161.925 ; 232.283,32.639 231.775,31.115 ; 232.283,160.401 231.775,161.925
  text "200.025 (mm)" at 120.056,162.916 h1.52
  text "GND" at 57.15,153.543 h1 r90
  text "+12V" at 216.408,146.304 h1
  text "+9V" at 216.408,141.224 h1
  text "TX" at 69.85,137.16 h1.52
  text "+5V" at 216.408,136.144 h1
  text "GND" at 216.916,130.81 h1
  text "POWER SUPPLY" at 222.885,130.175 h1.52 r90
  text "RS232" at 74.676,128.524 h1.52
  text "OUT" at 216.916,125.984 h1
  text "1~5V" at 222.25,121.158 h1.52 r90
  text "GND" at 216.916,120.904 h1
  text "RX" at 69.85,120.015 h1.52
  text "TX" at 69.85,116.205 h1.52
  text "OUT" at 216.916,115.824 h1
  text "B" at 38.989,111.76 h1
  text "GND" at 216.916,110.744 h1
  text "4~20mA" at 222.504,109.22 h1.52 r90
  text "RS485" at 74.676,107.442 h1.52
  text "A" at 38.989,106.68 h1
  text "RS485" at 36.068,103.378 h1.52 r90
  text "GND" at 37.973,101.6 h1
  text "NC" at 217.17,100.33 h1.52
  text "RX" at 69.85,99.06 h1.52
  text "+5V" at 37.846,96.52 h1
  text "TX" at 83.82,95.25 h1.52
  text "COM" at 217.17,95.25 h1.2
  text "RELAY" at 222.885,92.075 h1.52 r90
  text "IN" at 38.608,91.694 h1
  text "NO" at 217.17,90.17 h1.52
  text "LM35" at 35.814,89.408 h1.5 r90
  text "130.81 (mm)" at 232.689,89.004 h1.52 r90
  text "GND" at 37.846,86.487 h1
  text "MCU" at 76.2,86.36 h1.52
  text "IN" at 38.481,81.407 h1
  text "G" at 218.694,80.264 h1.52 r90
  text "RX" at 83.82,78.105 h1.52
  text "GND" at 37.846,76.327 h1
  text "SCR" at 221.996,75.946 h1.52 r90
  text "K" at 218.694,75.184 h1.52 r90
  text "4~20mA" at 36.322,74.93 h1.5 r90
  text "G" at 218.694,70.104 h1.52 r90
  text "220V" at 37.592,66.294 h0.8
  text "SCR" at 221.996,65.786 h1.52 r90
  text "K" at 218.694,65.024 h1.52 r90
  text "ZERO" at 35.306,61.976 h1.2 r90
  text "220V" at 37.592,61.468 h0.8
  text "CROSSING" at 37.084,59.69 h1.2 r90
  text "~" at 38.862,50.038 h1.5
  text "~" at 38.862,45.212 h1.2
  text "12V/AC" at 36.068,44.831 h1.52 r90

## Text inside footprints (layer, text, board x,y; h text height)
C1: Top Overlay "+" at 45.962,90.154 h1.5 r90
C9: Top Overlay "+" at 55.36,35.445 h1.5 r90
C10: Top Overlay "+" at 100.445,36.715 h1.5 r90
C11: Top Overlay "+" at 202.68,41.73 h1.5 r90
C14: Top Overlay "+" at 150.38,61.775 h1.5 r270
C16: Top Overlay "+" at 201.18,59.87 h1.5 r270
"C17_U_PWM to DC1": Top Overlay "+" at 181.79,135.37 h1.5 r180
"C17_U_PWM to DC2": Top Overlay "+" at 204.29,121.805 h1.5
C20: Top Overlay "+" at 65.798,82.603 h1.5 r270
C21: Top Overlay "+" at 56.695,120.765 h1.5 r180
C22: Top Overlay "+" at 61.71,121.74 h1.5 r90
C23: Top Overlay "+" at 61.71,129.36 h1.5 r90
C24: Top Overlay "+" at 59.75,146.484 h1.5 r270
C26: Top Overlay "+" at 113.792,88.9 h1.5
C27: Top Overlay "+" at 44.958,82.042 h1.5 r270
D1_U_Display_LED1: Top Overlay "+" at 157.48,115.316 h0.8
D1_U_Display_LED2: Top Overlay "+" at 156.972,107.442 h0.8
D1_U_Display_LED3: Top Overlay "+" at 157.48,102.616 h0.8
D1_U_Display_LED4: Top Overlay "+" at 156.972,94.742 h0.8
D1_U_Display_LED5: Top Overlay "+" at 157.48,90.17 h0.8
D1_U_Display_LED6: Top Overlay "+" at 156.972,82.042 h0.8
D1_U_Display_LED7: Top Overlay "+" at 157.734,77.724 h0.8
D1_U_Display_LED8: Top Overlay "+" at 156.972,69.342 h0.8
D3: Top Overlay "+" at 71.755,103.505 h0.8 r90
D4: Top Overlay "~" at 45.593,39.624 h1 r90; Top Overlay "~" at 45.847,43.434 h1.2 r90; Top Overlay "+" at 45.339,35.306 h1 r90; Top Overlay "-" at 45.339,47.244 h1.2 r90
D5: Top Overlay "+" at 62.454,35.245 h0.8
D11: Top Overlay "+" at 89.765,66.451 h0.8 r270
D12: Top Overlay "+" at 48.671,157.25 h0.8 r180
D13: Top Overlay "+" at 64.359,158.98 h0.8
D14: Top Overlay "+" at 182.348,99.598 h0.8 r270
J9: Top Overlay "1" at 41.68,126.925 h1.5 r90; Top Overlay "5" at 41.68,137.755 h1.5 r90; Top Overlay "9" at 32.28,136.37 h1.5 r90; Top Overlay "6" at 32.28,128.06 h1.5 r90
LS1: Top Overlay "+" at 108.41,55.14 h0.8
RL1: Top Overlay "NO" at 213.004,88.824 h0.8 r90; Top Overlay "NC" at 213.182,100.787 h0.8 r90